# Altium PCB BreakLight2024.PcbDoc
Units mm, origin at the board's own origin, x right, y up, seen from the top; angles counter-clockwise.
Board outline 120 x 17.5 mm, 2 copper layers (Top Layer, Bottom Layer); 27 components, 26 nets, 58 pads, 5 vias.
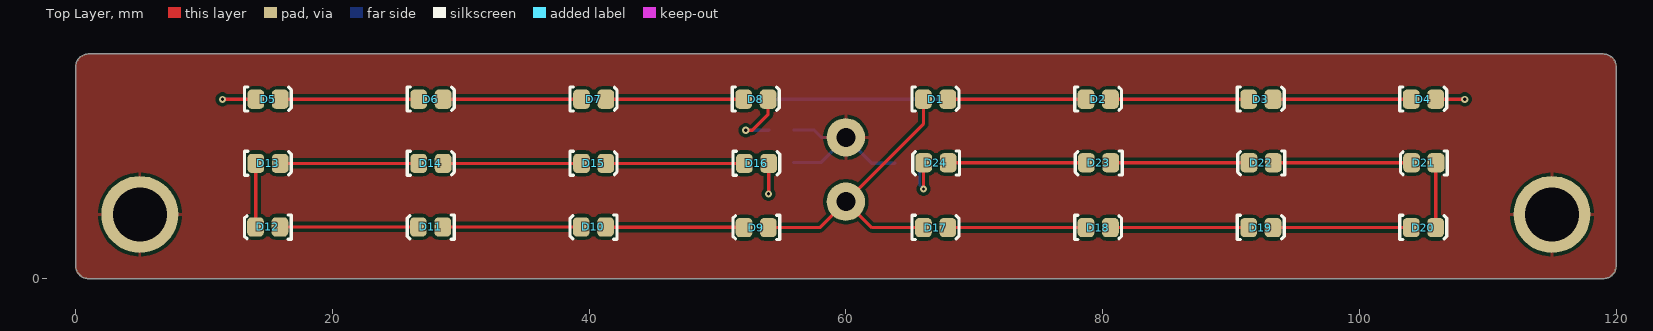
[diagram p0: Top Layer view]
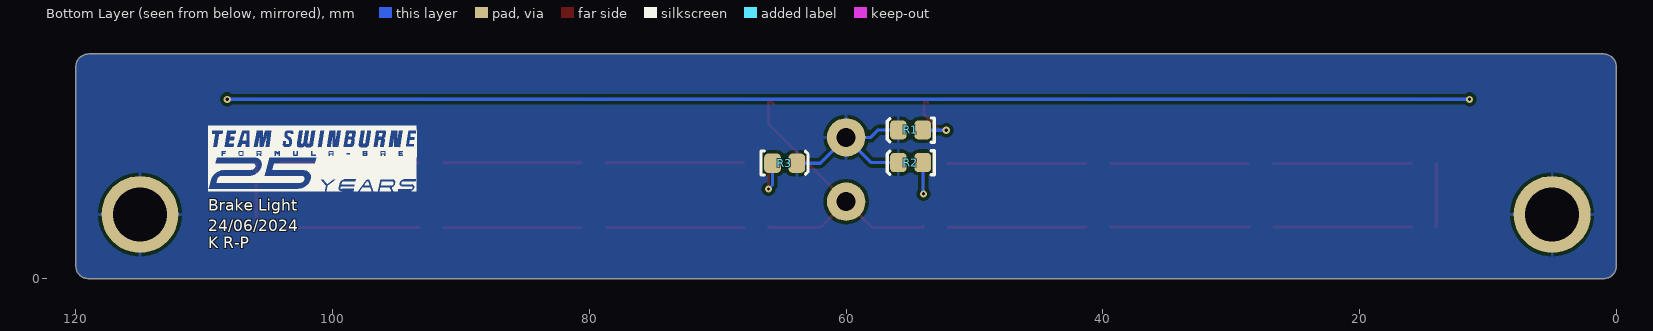
[diagram p1: Bottom Layer view, seen from below]
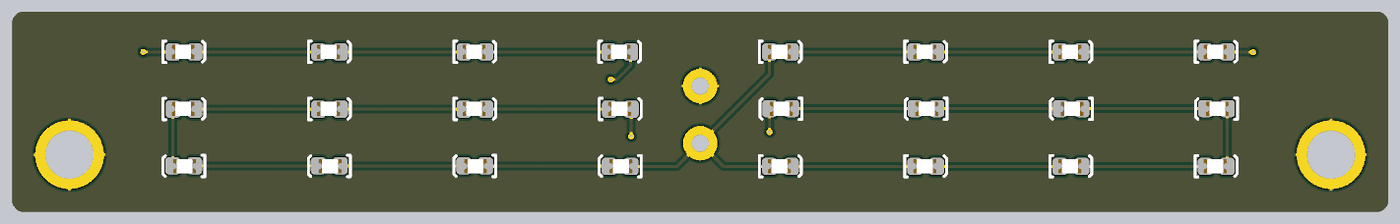
[diagram p2: 3D render of the assembled board from above, using the file's embedded part models]
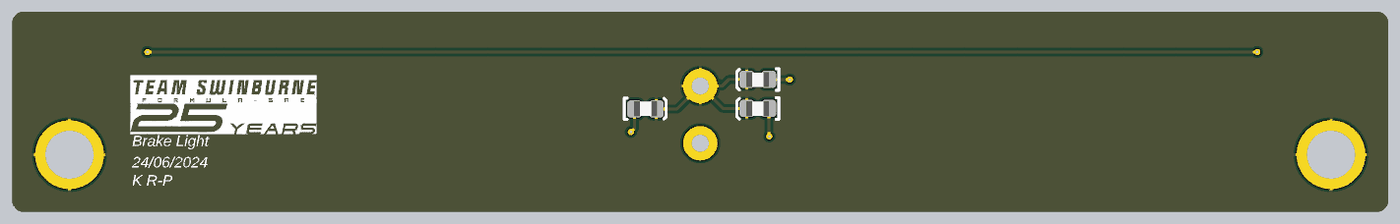
[diagram p3: 3D render of the assembled board from below, using the file's embedded part models]

## Layer stack, top to bottom
Top Solder: solder mask 0.0102, Solder Resist, Dk 3.5
Top Layer: signal copper 0.0356
Dielectric 1: dielectric 0.32, FR-4, Dk 4.8
Bottom Layer: signal copper 0.0356
Bottom Solder: solder mask 0.0102, Solder Resist, Dk 3.5

## Board outline
0,1 0,16.5 cw(c1,16.5) 1,17.5 119,17.5 cw(c119,16.5) 120,16.5 120,1 cw(c119,1) 119,0 1,0 cw(c1,1)

## Design rules (kind name [scope] priority, off if disabled: settings)
Clearance [All] p1: gap=0.254 ignorepadtopadclearanceinfootprint=FALSE
PolygonConnect [All] p1: connectstyle=Relief reliefconductorwidth=0.254 reliefentries=4 polygonreliefangle="90 Angle" airgapwidth=0.254
RoutingVias [All] p1: holewidth=0.711 width=1.27 viastyle="Through Hole" minholewidth=0.711 minwidth=1.27 maxholewidth=0.711 maxwidth=1.27
SolderMaskExpansion [All] p1: expansion=0.102 istentingtop=FALSE
Width [All] p1: maxlimit=0.254 minlimit=0.254 preferedwidth=0.254
30 further rules are at their usual default settings.

## Components (designator, comment, footprint, x,y, rotation, side; value= is the part's Value field where it differs from the comment)
D1 "Red" "0805 LED"#1 67,14 r0 top
D2 "Red" "0805 LED"#1 79.667,14 r0 top
D3 "Red" "0805 LED"#1 92.333,14 r0 top
D4 "Red" "0805 LED"#1 105,14 r0 top
D5 "Red" "0805 LED"#1 15,14 r0 top
D6 "Red" "0805 LED"#1 27.683,14 r0 top
D7 "Red" "0805 LED"#1 40.366,14 r0 top
D8 "Red" "0805 LED"#1 53,14 r0 top
D9 "Red" "0805 LED"#2 53,4 r180 top
D10 "Red" "0805 LED"#1 40.317,4 r180 top
D11 "Red" "0805 LED"#1 27.634,4 r180 top
D12 "Red" "0805 LED"#1 14.952,4 r180 top
D13 "Red" "0805 LED"#1 15,9 r0 top
D14 "Red" "0805 LED"#1 27.683,9 r0 top
D15 "Red" "0805 LED"#1 40.366,9 r0 top
D16 "Red" "0805 LED"#1 53.048,9 r0 top
D17 "Red" "0805 LED"#1 67,4 r0 top
D18 "Red" "0805 LED"#1 79.667,4 r0 top
D19 "Red" "0805 LED"#1 92.333,4 r0 top
D20 "Red" "0805 LED"#1 105,4 r0 top
D21 "Red" "0805 LED"#1 105,9 r180 top
D22 "Red" "0805 LED"#1 92.333,9 r180 top
D23 "Red" "0805 LED"#1 79.667,9 r180 top
D24 "Red" "0805 LED"#1 67,9 r180 top
R1 "470R" 0805 54.991,11.557 r0 bottom
R2 "470R" 0805 54.991,9.017 r0 bottom
R3 "470R" 0805 64.77,9.017 r180 bottom

## Footprints (in the part's own frame and the unit in brackets; to place one, negate y for a bottom-side part, rotate by r counter-clockwise, add the part's x,y. Pads: shape width x height; smd on the part's side, far side on the other; paste and mask are expansions set on the pad)
0805 [mm]
  rrect50% 1.3x1.5 smd: 1(-0.962,-0.026) 2(0.938,-0.026)
  silkscreen extent -1.85,-0.95 1.8,0.93, body extent -1,-0.65 1,0.66, height 0.73
"0805 LED"#1 [mm]
  rrect50% 1.3x1.5 smd: A(-0.962,-0.026) K(0.938,-0.026)
  silkscreen extent -1.85,-0.95 1.8,0.93, body extent -1.09,-0.63 0.91,0.62, height 1
"0805 LED"#2 [mm]
  rrect50% 1.3x1.5 smd: A(-0.962,0.026) K(0.938,0.026)
  silkscreen extent -1.85,-0.93 1.8,0.95, body extent -1.09,-0.63 0.91,0.63, height 1

## Part data
D1 D2 D3 D4 D5 D6 D7 D8 D9 D10 D11 D12 D13 D14 D15 D16 D17 D18 D19 D20 D21 D22 D23 D24: library part SML-210LTT86, "Red LED Indication - Discrete 1.75V 0805 (2012 Metric)", Digikey Part Number=511-1286-1-ND, Manufacturer="ROHM Semiconductor", Colour=Red, Part Number=SML-210LTT86
R1 R2 R3: library part RC0805FR07470RL, Digikey Part Number=311-470CRCT-ND, Manufacturer=YAGEO, Rated Power=0.125W, Tolerance=0.01, Material=FR-07, Part Number=RC0805FR07470RL

## Free pads (board coordinates)
  round 6 hole 4.2: 1(5,5) 2(115,5)
  round 3 hole 1.5: Gnd(60,11) Vcc(60,6)

## Via types
v1: diameter 0.55, hole 0.25, Top Layer to Bottom Layer, 5 vias

## Nets (pads, with @x,y where several pads share a name; then routed paths per layer and width w, separated by ;. In a path a pad name is that pad's centre, name@x,y a point inside that pad or via, vN(x,y) a via of type N, cw(c..) or ccw(c..) an arc to the next point about the centre after c; other vN are vias at no path point)
NetD1_A: D1.A D9.A D17.A pad.Vcc | length 25
  Top Layer w0.254: D9.A@53.962,4.074 D9.A 57.974,3.974 pad.Vcc ; D1.A@65.637,13.573 D1.A 66.04,13.972 66.04,12.04 pad.Vcc ; D17.A@66.038,4.074 D17.A 62.026,3.974 pad.Vcc
NetD1_K: D1.K D2.A | length 10.8
  Top Layer w0.254: D1.K D2.A
NetD2_K: D2.K D3.A | length 10.8
  Top Layer w0.254: D2.K D3.A
NetD3_K: D3.K D4.A | length 10.8
  Top Layer w0.254: D3.K D4.A
NetD4_K: D4.K D5.A | length 101.7
  Top Layer w0.254: v1(11.43,13.97) 14.034,13.97 D5.A ; D4.K 105.942,13.97 v1(108.204,13.97)
  Bottom Layer w0.254: v1(11.43,13.97) v1(108.204,13.97)
NetD5_K: D5.K D6.A | length 10.8
  Top Layer w0.254: D5.K D6.A
NetD6_K: D6.K D7.A | length 10.8
  Top Layer w0.254: D6.K D7.A
NetD7_K: D7.K D8.A | length 10.7
  Top Layer w0.254: D7.K D8.A
NetD8_K: D8.K R1.1 | length 5.7
  Top Layer w0.254: v1(52.197,11.557) 52.705,11.557 53.938,12.79 D8.K D8.K@53.656,13.691
  Bottom Layer w0.254: v1(52.197,11.557) 54.003,11.557 R1.1
NetD9_K: D9.K D10.A | length 10.9
  Top Layer w0.254: D10.A 41.305,4 52.007,4 52.07,3.937 52.07,3.966 D9.K
NetD10_K: D10.K D11.A | length 10.8
  Top Layer w0.254: D11.A D10.K
NetD11_K: D11.K D12.A | length 10.8
  Top Layer w0.254: D12.A D11.K
NetD12_K: D12.K D13.A | length 5
  Top Layer w0.254: D12.K 14.026,4.038 14.026,8.962 D13.A
NetD13_K: D13.K D14.A | length 10.8
  Top Layer w0.254: D13.K D14.A
NetD14_K: D14.K D15.A | length 10.8
  Top Layer w0.254: D14.K D15.A
NetD15_K: D15.K D16.A | length 10.8
  Top Layer w0.254: D15.K D16.A
NetD16_K: D16.K R2.1 | length 5.4
  Top Layer w0.254: v1(53.975,6.604) 53.981,6.61 53.981,8.968 D16.K D16.K@54.387,8.573
  Bottom Layer w0.254: v1(53.975,6.604) 54.002,6.631 54.002,9.016 R2.1
NetD17_K: D17.K D18.A | length 10.8
  Top Layer w0.254: D17.K D18.A
NetD18_K: D18.K D19.A | length 10.8
  Top Layer w0.254: D18.K D19.A
NetD19_K: D19.K D20.A | length 10.8
  Top Layer w0.254: D19.K D20.A
NetD20_K: D20.K D21.A | length 5.1
  Top Layer w0.254: D20.K 105.95,3.986 105.95,9.014 D21.A
NetD21_K: D21.K D22.A | length 10.8
  Top Layer w0.254: D22.A D21.K
NetD22_K: D22.K D23.A | length 10.8
  Top Layer w0.254: D23.A D22.K
NetD23_K: D23.K D24.A | length 10.8
  Top Layer w0.254: D24.A D23.K
NetD24_K: D24.K R3.1 | length 4.2
  Top Layer w0.254: v1(66.04,6.985) 66.051,6.996 66.051,9.015 D24.K
  Bottom Layer w0.254: R3.1 65.732,7.293 v1(66.04,6.985)
NetR1_2: pad.1 pad.2 pad.Gnd R1.2 R2.2 R3.2 | length 13.9
  Bottom Layer w0.254: R2.2 58.043,9.043 pad.Gnd ; R1.2 57.505,11.583 58.088,11 pad.Gnd ; R3.2 62.009,8.991 pad.Gnd

## Polygon pours and split planes (outlines as drawn)
NetR1_2 on Bottom Layer "NETR1_2_L02_P002" (solid, pour order 2): 0.889,0 119.126,0 ccw(c119.126,0.889) 120.015,0.889 120.015,16.51 ccw(c118.999,16.51) 118.999,17.526 1.016,17.526 ccw(c1.016,16.51) 0,16.51 0,0.889 ccw(c0.889,0.889)
NetR1_2 on Top Layer "NETR1_2_L01_P000" (solid, pour order 0): 0.889,0 119.126,0 ccw(c119.126,0.889) 120.015,0.889 120.015,16.51 ccw(c118.999,16.51) 118.999,17.526 1.016,17.526 ccw(c1.016,16.51) 0,16.51 0,0.889 ccw(c0.889,0.889)

## Silkscreen, mask and mechanical layers (free items; w line width, h text height)
Bottom Overlay:
  drawing of 16 lines, arcs and shapes, not listed
  text "Brake Light" at 109.69,4.966 h1.5
  text "24/06/2024" at 109.69,3.391 h1.5
  text "K R-P" at 109.69,2.041 h1.5
Mechanical 1:
  the board outline again, w0.254
Drill Drawing:
  circle w0.254: c2.556,51.964 r0.847
  lines w0.254: 1.709,47.731 2.133,47.731 2.556,47.307 2.979,47.731 3.403,47.731 2.979,48.154 3.403,48.577 2.979,48.577 2.556,49.001 2.133,48.577 1.709,48.577 2.133,48.154 1.709,47.731 ; 1.709,54.927 2.556,55.351 3.403,54.927 2.979,55.774 3.403,56.621 2.556,56.197 1.709,56.621 2.133,55.774 1.709,54.927
  lines w0.381: 0.191,46.164 266.157,46.164 ; 0.191,57.594 266.157,57.594 ; 14.183,42.355 14.183,61.404 ; 26.372,42.355 26.372,61.404 ; 55.573,42.355 55.573,61.404 ; 68.422,42.355 68.422,61.404 ; 87.061,42.355 87.061,61.404 ; 125.15,42.355 125.15,61.404 ; 140.132,42.355 140.132,61.404 ; 159.075,42.355 159.075,61.404 ; 175.581,42.355 175.581,61.404 ; 197.266,42.355 197.266,61.404 ; 231.14,42.355 231.14,61.404 ; 0.191,42.355 266.157,42.355 266.157,61.404 0.191,61.404 0.191,42.355
  text "Symbol" at 2.476,58.737 h1.83
  text "Count" at 15.326,58.737 h1.83
  text "Hole Size" at 27.515,58.737 h1.83
  text "Plated" at 56.716,58.737 h1.83
  text "Hole Type" at 69.565,58.737 h1.83
  text "Drill Layer Pair" at 88.204,58.737 h1.83
  text "Via/Pad" at 126.293,58.737 h1.83
  text "Pad Shape" at 141.275,58.737 h1.83
  text "Template" at 160.218,58.737 h1.83
  text "Description" at 176.724,58.737 h1.83
  text "Hole Tolerance (+)" at 198.409,58.737 h1.83
  text "Hole Tolerance (-)" at 232.283,58.737 h1.83
  text "2" at 15.326,54.927 h1.52
  text "1.500mm (59.06mil)" at 27.515,54.927 h1.52
  text "PTH" at 56.716,54.927 h1.52
  text "Round" at 69.565,54.927 h1.52
  text "Top Layer - Bottom Layer" at 88.204,54.927 h1.52
  text "Pad" at 126.293,54.927 h1.52
  text "Rounded" at 141.275,54.927 h1.52
  text "c300h150" at 160.218,54.927 h1.52
  text "2" at 15.326,51.117 h1.52
  text "4.200mm (165.35mil)" at 27.515,51.117 h1.52
  text "PTH" at 56.716,51.117 h1.52
  text "Round" at 69.565,51.117 h1.52
  text "Top Layer - Bottom Layer" at 88.204,51.117 h1.52
  text "Pad" at 126.293,51.117 h1.52
  text "Rounded" at 141.275,51.117 h1.52
  text "c600h420" at 160.218,51.117 h1.52
  text "5" at 15.326,47.307 h1.52
  text "0.250mm (9.84mil)" at 27.515,47.307 h1.52
  text "PTH" at 56.716,47.307 h1.52
  text "Round" at 69.565,47.307 h1.52
  text "Top Layer - Bottom Layer" at 88.204,47.307 h1.52
  text "Via" at 126.293,47.307 h1.52
  text "Rounded" at 141.275,47.307 h1.52
  text "v55h25" at 160.218,47.307 h1.52
  text "9 Total" at 15.326,43.497 h1.52
  text "FABRICATION NOTES" at 128.082,33.4 h3
  text "1. QUANTITY: 5" at 128.082,28.304 h3
  text "2. SIZE: 120mm x 17.5mm" at 128.082,23.207 h3
  text "3. LAYERS: 2" at 128.082,18.111 h3
  text "4. COPPER WEIGHT: 2oz" at 128.082,14.014 h3
  text "5. SOLDER MASK: Black" at 128.307,9.154 h3
  text "6. SILKSCREEN: White" at 128.307,4.057 h3
  text "7. SURFACE FINISH: ENIG" at 128.307,-1.039 h3
  text "8. TOTAL THICKNESS: 1.6mm" at 127.797,-5.997 h3
  text "9. VIAS: TENTED" at 128.097,-10.922 h3

## Dimensions
0,16.51 to 120.015,16.51 on Top Layer
118.999,17.526 to 119.126,0 on Top Layer